# EAGLE board PCB-DISPLAYDOGM1_tall_design (EAGLE 7.1.0)
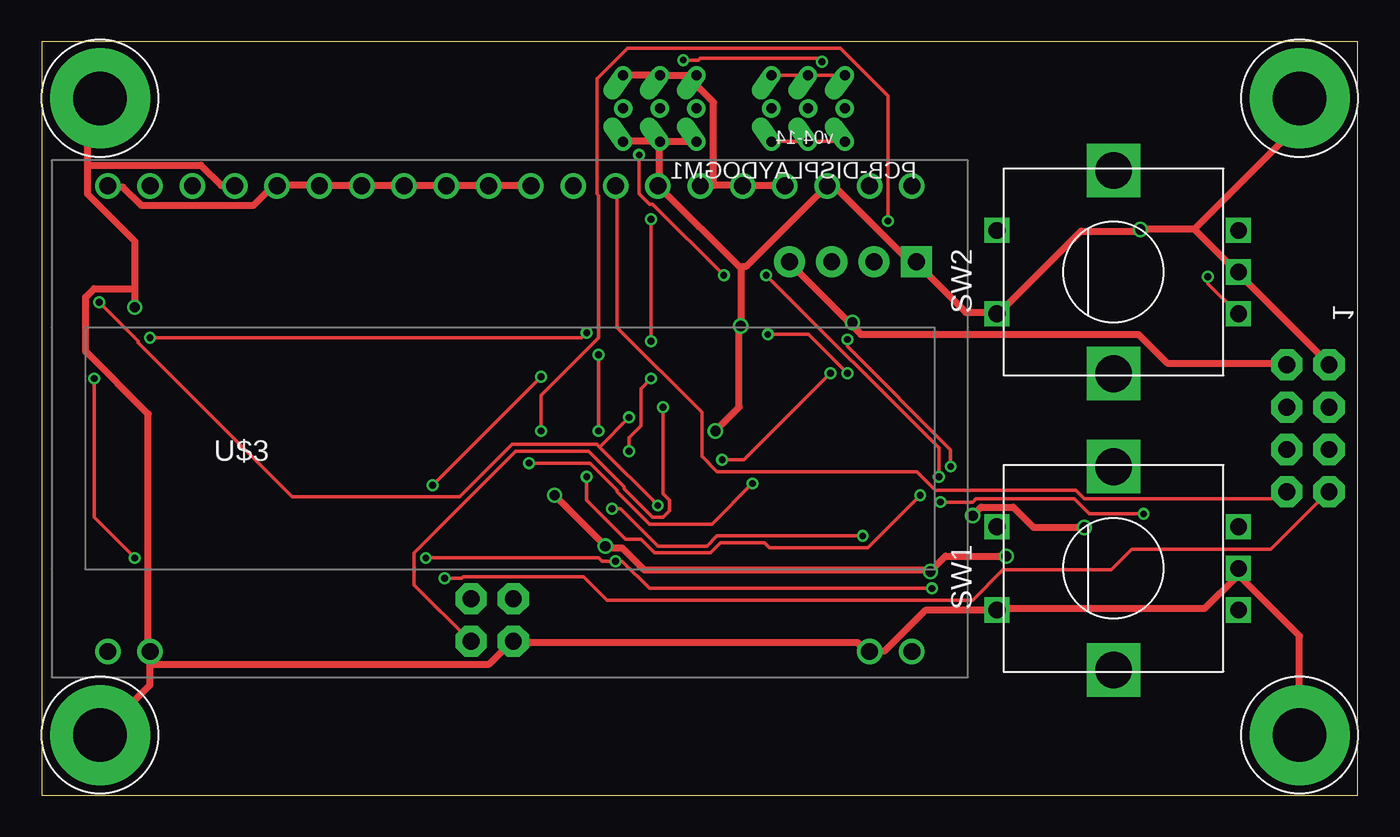
[diagram p0: board, top side]
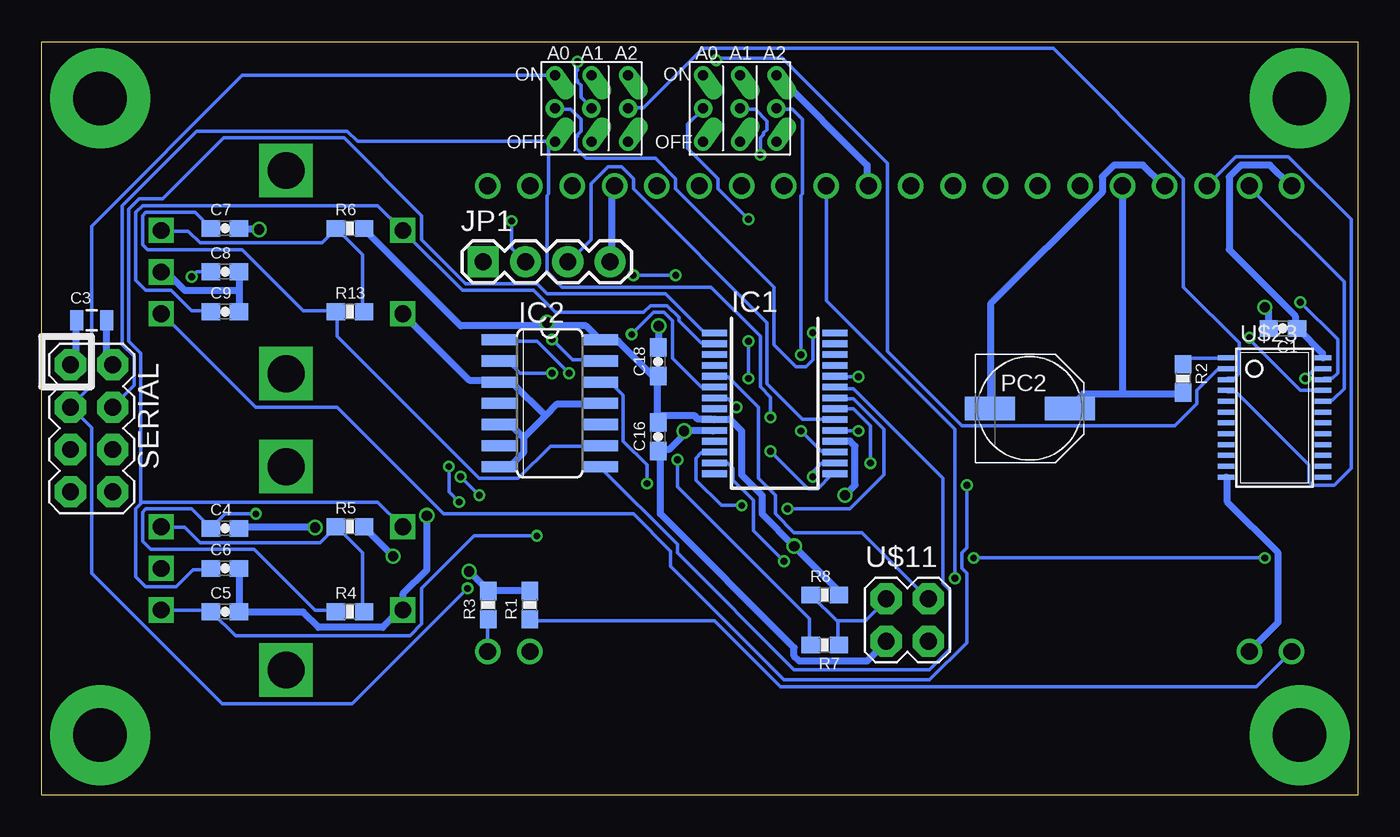
[diagram p1: board, bottom side, seen from below]

Size 79 x 45.2 mm. Coordinates in mm from the lower left corner, seen from the top.
Outline: 79,0 79,45.2 0,45.2 0,0 79,0
Copper layers (1*16): Top 0.035mm / dielectric 1.5mm / Bottom 0.035mm
Design rules "Fusion_eagle_rule_v1.1": minimum track width 6mil, minimum drill 12mil, track to track 6mil, track to pad 6mil, pad to pad 6mil, via to via 6mil, smd to smd 0mil, copper to edge 10mil, drill to drill 10mil, minimum pad ring 10mil, minimum via ring 6mil, stop-mask expansion 2mil, vias tented up to drill 100mil, thermal gap 10mil
Net classes: 0 default: width 0.203 mm, drill 0.406 mm, clearance 0.203 mm; 1 Power: width 0.406 mm, drill 0.61 mm, clearance 0.203 mm; 2 BoostPower: width 0.61 mm, drill 0.61 mm, clearance 0.305 mm

## Footprints (pad centres in the part's own frame; a part is rotated, then mirrored left to right if it is on the bottom)
0603-CAP = smd 1.1 x 1: 1 -0.85,0; 2 0.85,0
0805 = smd 0.8 x 1.2: 1 -0.9,0; 2 0.9,0
SSOP28 = smd 0.4 x 1.5: 1 -4.225,-3.625; 2 -3.575,-3.625; 3 -2.925,-3.625; 4 -2.275,-3.625; 5 -1.625,-3.625; 6 -0.975,-3.625; 7 -0.325,-3.625; 8 0.325,-3.625; 9 0.975,-3.625; 10 1.625,-3.625; 11 2.275,-3.625; 12 2.925,-3.625; 13 3.575,-3.625; 14 4.225,-3.625; 15 4.225,3.625; 16 3.575,3.625; 17 2.925,3.625; 18 2.275,3.625; 19 1.625,3.625; 20 0.975,3.625; 21 0.325,3.625; 22 -0.325,3.625; 23 -0.975,3.625; 24 -1.625,3.625; 25 -2.275,3.625; 26 -2.925,3.625; 27 -3.575,3.625; 28 -4.225,3.625
SO14 = smd 0.66 x 2.032: 1 -3.81,-3.073; 2 -2.54,-3.073; 3 -1.27,-3.073; 4 0,-3.073; 5 1.27,-3.073; 6 2.54,-3.073; 7 3.81,-3.073; 8 3.81,3.073; 9 2.54,3.073; 10 1.27,3.073; 11 0,3.073; 12 -1.27,3.073; 13 -2.54,3.073; 14 -3.81,3.073
1X04 = drill 1.016 pad 1.88 square: 1 0,0 | drill 1.016 pad 1.88: 2 2.54,0; 3 5.08,0; 4 7.62,0
PANASONIC_D = smd 3 x 1.4: + 2.4,0; - -2.4,0
0603-RES = smd 1.1 x 1: 1 -0.85,0; 2 0.85,0
2X4 = drill 1.016 pad 1.88 octagon: 1 -3.81,-1.27; 2 -3.81,1.27; 3 -1.27,-1.27; 4 -1.27,1.27; 5 1.27,-1.27; 6 1.27,1.27; 7 3.81,-1.27; 8 3.81,1.27
ALPS_EC12E_SW = drill 1 square: A -2.5,-7.5; B 2.5,-7.5; C 0,-7.5; D -2.5,7; E 2.5,7 | drill 2.2 square: GND1 -6.1,0; GND2 6.1,0
3.2MMPAD6MM = drill 3.2 pad 6: P$1 0,0
DOGM = drill 1.016: 1 -24.13,-12.19; 2 -21.59,-12.19; 19 21.59,-12.19; 20 24.13,-12.19; 21 24.13,15.75; 22 21.59,15.75; 23 19.05,15.75; 24 16.51,15.75; 25 13.97,15.75; 26 11.43,15.75; 27 8.89,15.75; 28 6.35,15.75; 29 3.81,15.75; 30 1.27,15.75; 31 -1.27,15.75; 32 -3.81,15.75; 33 -6.35,15.75; 34 -8.89,15.75; 35 -11.43,15.75; 36 -13.97,15.75; 37 -16.51,15.75; 38 -19.05,15.75; 39 -21.59,15.75; 40 -24.13,15.75
3BITADDR = drill 0.6: A0 -2.2,0; A1 0,0; A2 2.2,0 | drill 0.6 offset: H1 -2.2,2; H2 0,2; H3 2.2,2; L1 -2.2,-2; L2 0,-2; L3 2.2,-2
2X2 = drill 1.016 pad 1.88 octagon: 1 -3.81,-1.27; 2 -3.81,1.27; 3 -1.27,-1.27; 4 -1.27,1.27
TSSOP24 = smd 0.305 x 0.991: 1 -4.225,-2.918; 2 -3.575,-2.918; 3 -2.925,-2.918; 4 -2.275,-2.918; 5 -1.625,-2.918; 6 -0.975,-2.918; 7 -0.325,-2.918; 8 0.325,-2.918; 9 0.975,-2.918; 10 1.625,-2.918; 11 2.275,-2.918; 12 2.925,-2.918; 13 2.925,2.918; 14 2.275,2.918; 15 1.625,2.918; 16 0.975,2.918; 17 0.325,2.918; 18 -0.325,2.918; 19 -0.975,2.918; 20 -1.625,2.918; 21 -2.275,2.918; 22 -2.925,2.918; 23 -3.575,2.918; 24 -4.225,2.918

## Placement (x,y rotation side)
C1  0.1uF  [0603-CAP]  4.5,28 180 bottom
C3  10uF  [0805]  76,28.5 180 bottom
C4  100nF  [0603-CAP]  68,16 0 bottom
C5  10nF  [0603-CAP]  68,11 0 bottom
C6  10nF  [0603-CAP]  68,13.6 0 bottom
C7  100nF  [0603-CAP]  68,34 0 bottom
C8  10nF  [0603-CAP]  68,31.4 0 bottom
C9  10nF  [0603-CAP]  68,29 0 bottom
C16  100nF  [0603-CAP]  42,21.5 90 bottom
C18  100nF  [0603-CAP]  42,26 90 bottom
IC1  MCP23017SS  [SSOP28]  35,23.5 270 bottom
IC2  74HC14D  [SO14]  48.5,23.5 270 bottom
JP1  [1X04]  52.5,32 0 bottom
PC2  47u  [PANASONIC_D]  19.7,23.2 0 bottom
R1  30R/0.1W  [0603-RES]  49.7,11.4 90 bottom
R2  10K  [0603-RES]  10.5,25 270 bottom
R3  30R/0.1W  [0603-RES]  52.2,11.4 90 bottom
R4  10K  [0603-RES]  60.5,11 0 bottom
R5  10K  [0603-RES]  60.5,16.1 0 bottom
R6  10K  [0603-RES]  60.5,34 0 bottom
R7  10K  [0603-RES]  32,9 180 bottom
R8  10K  [0603-RES]  32,12 0 bottom
R13  10K  [0603-RES]  60.5,29 0 bottom
SERIAL  M04X2  [2X4]  76,22 270 bottom
SW1  EC12E_SW  [ALPS_EC12E_SW]  64.33,13.6 90 top
SW2  EC12E_SW  [ALPS_EC12E_SW]  64.33,31.38 90 top
U$2  GNDPAD6MM  [3.2MMPAD6MM]  3.5,3.6 0 top
U$3  DOGM_DISPLAY  [DOGM]  28.1,20.8 0 top
U$7  GNDPAD6MM  [3.2MMPAD6MM]  75.5,41.8 0 top
U$10  3BITADDR  [3BITADDR]  37.1,41.2 0 bottom
U$11  M02X2  [2X2]  24.5,10.5 0 bottom
U$19  3BITADDR  [3BITADDR]  46,41.2 0 bottom
U$20  GNDPAD6MM  [3.2MMPAD6MM]  3.5,41.8 0 top
U$21  GNDPAD6MM  [3.2MMPAD6MM]  75.5,3.6 0 top
U$23  PCA9671  [TSSOP24]  5,22 270 bottom

## Library data of the parts
C1 C3-C9 C16 C18 JP1 R1-R8 R13 SERIAL = SparkFun
IC1 = microchip; MF: MICROCHIP; MPN: MCP23017-E/SS; OC_FARNELL: 1467674; OC_NEWARK: 31K2960
IC2 = 74xx-eu
PC2 = rcl
SW1 SW2 = switch-alps; MPN: EC12E2424407; OC_FARNELL: 1520813; OC_NEWARK: 74M1068
U$2 U$3 U$7 U$10 U$11 U$19-U$21 U$23 = SKAARHOJ

## Nets
5V [Power]: C1.1 C3.1 C16.2 C18.1 IC1.9 IC1.18 IC2.14 JP1.4 PC2.+ R1.2 R2.2 R3.2 R5.2 R6.2 R8.2 SERIAL.2 U$3.24 U$3.25 U$3.26 U$3.30 U$3.31 U$3.32 U$3.33 U$3.34 U$3.35 U$3.36 U$3.40 U$10.H1 U$10.H2 U$10.H3 U$23.24
A0: U$19.A0 U$23.21
A0A: IC1.15 U$10.A0
A1: U$19.A1 U$23.2
A1A: IC1.16 U$10.A1
A2: U$19.A2 U$23.3
A2A: IC1.17 U$10.A2
AD0: C6.1 IC1.1 SW1.E
AD1: C9.1 IC1.2 SW2.E
AD4: IC1.5 U$11.4
C/D: U$3.39 U$23.20
CS1: U$3.38 U$23.4
D2: IC1.21 IC2.12
D3: C5.1 IC1.22 SW1.A
D4: IC1.23 IC2.8
D5: C8.1 IC1.24 SW2.A
D10: IC1.6 IC2.2
D11: IC1.7 U$11.3
GND [Power]: C1.2 C3.2 C4.2 C5.2 C6.2 C7.2 C8.2 C9.2 C16.1 C18.2 IC1.10 IC2.3 IC2.5 IC2.7 IC2.11 JP1.1 PC2.- SERIAL.1 SW1.C SW1.D SW2.C SW2.D U$2.P$1 U$3.2 U$3.19 U$3.23 U$3.27 U$3.37 U$7.P$1 U$10.L1 U$10.L2 U$10.L3 U$11.1 U$20.P$1 U$21.P$1 U$23.12
I2C_SCL: IC1.12 SERIAL.4 U$19.L1 U$19.L2 U$19.L3 U$23.22
I2C_SDA: IC1.13 SERIAL.3 U$19.H1 U$19.H2 U$19.H3 U$23.23
N$1: R2.1 U$23.1
N$2: R1.1 U$3.1
N$3: R3.1 U$3.20
N$4: R4.2 R5.1 SW1.B
N$5: IC2.1 R7.2
N$6: R6.1 R13.2 SW2.B
N$17: IC1.19 JP1.2
N$18: IC1.20 JP1.3
N$124: C4.1 IC2.13 R4.1
N$125: C7.1 IC2.9 R13.1
N$127: R7.1 R8.1 U$11.2
SPI_MOSI: SERIAL.8 U$3.28
SPI_SCLK: SERIAL.7 U$3.29

## Tracks (layer width: path | path; a pad name or v marks a point on that pad's centre or on a via)
5V  (via drill 0.61)
  Top 0.406: v57.91,14.33 54.25,14.33 v53.34,13.41 53.24,13.51 36.17,13.51 34.85,14.83 33.93,14.83 v33.83,14.94 v30.79,17.98 | U$3.30 29.36,36.58 27.03,36.58 U$3.31 26.82,36.58 24.49,36.58 U$3.32 24.28,36.58 21.95,36.58 U$3.33 21.74,36.58 19.41,36.58 U$3.34 19.2,36.58 16.87,36.58 U$3.35 16.66,36.58 14.22,36.58 U$3.36 13.92,36.58 12.7,35.36 5.99,35.36 4.88,36.47 4.06,36.47 U$3.40 | U$10.H3 34.95,43.18 37.08,43.18 U$10.H2 37.29,43.18 39.22,43.18 U$10.H1 39.22,42.98 39.22,42.67 40.34,41.55 40.34,36.58 | 40.34,36.58 42.06,36.58 U$3.25 42.27,36.58 44.6,36.58 U$3.24 | 40.34,36.58 39.62,36.58 U$3.26 | 48.56,28.25 44.91,31.9 JP1.4 | 48.56,28.25 49.17,27.64 65.84,27.64 67.56,25.91 74.68,25.91 SERIAL.2 | v48.67,28.35 48.56,28.25
  Bottom 0.406: 48.67,28.14 46.33,28.14 45.52,27.33 IC2.14 45.31,27.23 44.4,27.23 42.27,25.09 C18.1 42.06,25.09 42.06,22.35 C16.2 41.96,22.76 39.83,22.76 39.62,22.55 38.81,22.55 IC1.9 38.61,22.55 37.69,22.55 36.98,21.84 36.98,19.2 35.76,17.98 35.76,16.87 v33.83,14.94 31.19,12.29 31.19,12.09 R8.2 | 48.67,28.14 53.85,28.14 59.64,33.93 R6.2 | R1.2 49.78,12.29 52.12,12.29 R3.2 52.32,12.39 v53.34,13.41 | v57.91,14.33 59.64,16.05 R5.2 | v30.79,17.98 30.18,18.59 30.18,20.93 30.48,21.23 31.29,21.23 IC1.18 | U$23.24 2.13,26.31 2.13,26.52 3.56,27.94 C1.1 3.76,28.14 3.76,28.75 7.72,32.72 7.72,37.08 7.01,37.8 5.28,37.8 4.06,36.58 U$3.40 | 14.12,24.08 16.46,24.08 17.27,23.27 PC2.+ | 14.12,24.08 10.57,24.08 R2.2 | 14.12,24.08 14.12,36.47 U$3.36 | C3.1 75.08,28.45 75.08,26.21 74.78,25.91 SERIAL.2 | JP1.4 44.81,32 44.81,36.37 44.7,36.47 U$3.24 | U$3.30 29.46,36.58 29.46,37.8 34.85,43.18 U$10.H3 | v48.67,28.35 48.67,28.14
A0  (via drill 0.41)
  Top 0.203: v6.5,27.43 32.41,27.43 v32.72,27.74
  Bottom 0.203: v6.5,27.43 6.5,27.33 3.45,24.28 2.13,24.28 U$23.21 | v32.72,27.74 32.72,26.11 33.12,25.7 33.73,25.7 35.05,27.03 35.05,30.48 40.95,36.37 40.95,36.98 42.16,38.2 46.33,38.2 46.94,38.81 46.94,39.42 46.84,39.52 46.84,39.62 46.63,39.83 46.63,40.54 47.24,41.15 48.16,41.15 U$19.A0
A0A  (via drill 0.41)
  Top 0.203: v35.26,20.62 35.26,21.44 35.97,22.15 35.97,24.38 v36.58,24.99 | v36.58,34.54 v36.58,27.23
  Bottom 0.203: v35.26,20.62 33.02,18.39 32.41,18.39 31.6,19.2 31.39,19.2 IC1.15 | v36.58,27.23 v36.58,24.99 | v36.58,34.54 38.41,36.37 38.41,36.98 40.23,38.81 40.23,40.23 39.32,41.15 U$10.A0
A1  (via drill 0.41)
  Top 0.203: v38.51,44.09 39.42,44.09 39.52,44.2 46.63,44.2 v46.84,43.99
  Bottom 0.203: v38.51,44.09 38.41,44.2 34.54,44.2 28.25,37.9 28.25,26.62 23.77,22.15 10.97,22.15 9.65,23.47 9.65,24.28 8.43,25.5 7.92,25.5 U$23.2 | v46.84,43.99 46.84,43.48 46.94,43.38 46.94,42.98 46.84,42.88 46.84,42.77 46.63,42.57 46.63,41.86 46.02,41.25 U$19.A1
A1A  (via drill 0.41)
  Top 0.203: v32.72,19.1 32.72,17.68 35.05,15.34 35.97,15.34 36.78,14.53 40.13,14.53 40.74,15.14 43.38,15.14 43.69,14.83 49.58,14.83 v52.73,17.98 | v53.85,19.1 53.85,20.83 v43.48,31.19 | v40.95,31.19 36.68,35.46 36.47,35.46 35.87,36.07 v35.87,38.41
  Bottom 0.203: v32.72,19.1 32.72,19.41 32.21,19.91 31.39,19.91 IC1.16 | v53.85,19.1 v52.73,17.98 | v40.95,31.19 v43.48,31.19 | v35.87,38.41 35.87,39.42 35.66,39.62 35.66,39.73 35.46,39.93 35.46,40.44 36.17,41.15 37.08,41.15 U$10.A1
A2
  Bottom 0.203: U$23.3 7.82,24.99 7.42,24.99 7.11,25.3 7.11,27.13 10.46,30.48 10.46,36.98 18.29,44.81 39.32,44.81 42.88,41.25 43.79,41.25 U$19.A2
A2A  (via drill 0.41)
  Top 0.203: v33.43,26.42 v33.43,21.84
  Bottom 0.203: v33.43,21.84 32.21,20.62 31.39,20.62 IC1.17 | v33.43,26.42 33.43,35.97 33.33,36.07 33.33,40.54 33.93,41.15 34.85,41.15 U$10.A2
AD0
  Bottom 0.203: 73,17.53 72.95,17.58 58.83,17.58 57.4,16.15 SW1.E | 73,17.53 73.36,17.17 73.36,13.11 72.75,12.5 70.92,12.5 69.9,13.51 68.89,13.51 C6.1 | IC1.1 38.71,27.74 39.22,27.74 41.55,30.07 48.67,30.07 49.28,30.68 53.54,30.68 56.19,33.33 56.19,34.75 60.86,39.42 68.07,39.42 71.73,35.76 73.15,35.76 73.76,35.15 73.76,27.23 73.05,26.52 73.05,17.58 73,17.53
AD1
  Bottom 0.203: C9.1 68.89,29.06 70,29.06 71.22,30.28 72.75,30.28 73.36,30.89 73.36,34.95 72.95,35.36 58.83,35.36 57.4,33.93 SW2.E 57.3,33.83 53.75,30.28 49.48,30.28 48.16,28.96 42.88,28.96 42.47,29.36 41.45,29.36 40.74,28.65 40.74,28.45 39.42,27.13 38.71,27.13 IC1.2
AD4
  Bottom 0.203: IC1.5 38.61,25.09 37.8,25.09 35.97,23.27 35.97,19 34.95,17.98 34.95,16.87 33.83,15.75 29.77,15.75 25.81,11.79 U$11.4
C/D
  Bottom 0.203: U$23.20 2.03,23.67 1.52,23.67 0.81,24.38 0.81,30.79 6.5,36.47 U$3.39
CS1
  Bottom 0.203: U$23.4 7.82,24.18 7.32,24.18 2.95,19.81 2.95,18.8 2.74,18.59 1.42,18.59 0.41,19.61 0.41,34.54 4.17,38.3 7.32,38.3 9.04,36.58 U$3.38
D2  (via drill 0.41)
  Top 0.203: v29.26,19.91 32.92,19.91 34.54,18.29 34.54,18.19 36.47,16.26 40.23,16.26 v42.67,18.69
  Bottom 0.203: v29.26,19.91 29.26,22.15 30.28,23.16 31.29,23.16 IC1.21 | v42.67,18.69 42.67,19.81 44.09,21.23 44.09,23.98 44.81,24.69 45.41,24.69 IC2.12
D3  (via drill 0.41)
  Top 0.203: v34.24,17.17 34.75,17.17 36.98,14.94 39.93,14.94 40.54,15.54 v49.28,15.54
  Bottom 0.203: SW1.A 71.73,11.07 68.89,11.07 C5.1 68.78,10.97 67.36,9.55 56.9,9.55 56.19,10.26 56.19,12.39 53.03,15.54 v49.28,15.54 | v34.24,17.17 30.48,17.17 28.45,19.2 28.45,21.95 30.28,23.77 31.29,23.77 IC1.22
D4
  Bottom 0.203: IC1.23 31.29,24.38 30.28,24.38 24.89,19 24.89,12.7 24.49,12.29 24.49,8.74 25.7,7.52 33.83,7.52 40.84,14.53 40.84,15.04 45.41,19.61 IC2.8
D5  (via drill 0.41)
  Top 0.203: v70,31.09 70,30.68 71.73,28.96 SW2.A | v23.47,18.59 v29.97,25.09
  Bottom 0.203: v70,31.09 69.7,31.39 68.89,31.39 C8.1 | v29.97,25.09 31.29,25.09 IC1.24 | v23.47,18.59 23.47,14.83 23.77,14.53 23.77,13.61 23.47,13.31 23.47,9.14 25.7,6.91 34.44,6.91 41.25,13.72 41.25,14.63 43.48,16.87 54.86,16.87 61.27,23.27 66.14,23.27 71.73,28.85 SW2.A
D10  (via drill 0.41)
  Top 0.203: v43.59,27.64 46.02,27.64 v48.36,25.3
  Bottom 0.203: v43.59,27.64 42.27,28.96 41.66,28.96 41.15,28.45 41.15,26.21 39.42,24.49 38.71,24.49 IC1.6 | v48.36,25.3 50.29,25.3 51,26.01 51.51,26.01 IC2.2
D11  (via drill 0.41)
  Top 0.203: v37.29,23.27 37.29,18.09 37.69,17.68 37.69,17.07 37.29,16.66 36.68,16.66 34.95,18.39 34.95,18.49 32.82,20.62 28.45,20.62 22.35,14.53 22.35,12.6 25.7,9.25 U$11.3
  Bottom 0.203: v37.29,23.27 37.8,23.77 38.61,23.77 IC1.7
GND  (via drill 0.61)
  Top 0.406: 69.19,33.93 v65.94,33.93 65.84,33.83 62.38,33.83 57.51,28.96 SW2.D 57.3,28.96 55.47,28.96 52.53,31.9 JP1.1 52.32,32 52.12,32 47.65,36.47 47.24,36.47 U$3.23 47.04,36.47 42.27,31.7 42.06,31.7 41.96,31.6 | 69.19,33.93 71.73,31.39 SW2.C 71.83,31.29 77.22,25.91 SERIAL.1 | U$10.L3 34.95,39.22 37.08,39.22 U$10.L2 | U$10.L1 39.22,39.22 37.29,39.22 U$10.L2 | 41.96,31.6 v41.96,28.14 41.86,28.04 41.86,23.27 v40.44,21.84 | 41.96,31.6 37.08,36.47 U$3.27 37.08,36.68 37.08,39.01 U$10.L2 | 69.19,33.93 75.49,40.23 75.49,41.76 U$7.P$1 | 5.59,30.38 5.59,33.22 2.74,36.07 2.74,37.8 | 5.59,30.38 v5.59,29.26 | 2.74,37.8 2.74,41.05 3.45,41.76 U$20.P$1 | 2.74,37.8 9.55,37.8 10.77,36.58 11.58,36.58 U$3.37 | 6.5,7.82 6.5,6.6 3.56,3.66 U$2.P$1 | 6.5,7.82 6.5,8.53 U$3.2 6.4,8.74 6.4,22.86 2.64,26.62 2.64,29.87 3.15,30.38 5.59,30.38 | v62.59,16.05 59.54,16.05 58.32,17.27 56.39,17.27 v55.88,16.76 | U$21.P$1 75.49,3.66 75.49,9.55 71.83,13.21 71.83,13.51 SW1.C 71.73,13.11 69.8,11.18 57.51,11.18 SW1.D 57.3,11.07 53.03,11.07 50.6,8.64 49.78,8.64 U$3.19 49.48,8.64 48.97,9.14 28.35,9.14 U$11.1 28.14,9.14 26.82,7.82 6.5,7.82
  Bottom 0.406: C3.2 76.91,28.45 76.91,26.21 77.22,25.91 SERIAL.1 | 67.16,30.28 C8.2 | 67.16,30.28 67.16,29.06 C9.2 | v65.94,33.93 67.06,33.93 C7.2 | 67.16,30.28 70.41,30.28 71.42,31.29 71.73,31.29 SW2.C | v41.96,28.14 41.96,26.92 C18.2 | 51.61,19.71 IC2.7 51.41,19.81 50.8,19.81 50.09,20.52 50.09,21.44 | 50.09,21.44 50.8,22.15 51.51,22.15 IC2.5 | 50.09,21.44 48.77,22.76 | 48.77,22.76 48.06,23.47 45.52,23.47 IC2.11 | 48.77,22.76 50.7,24.69 51.51,24.69 IC2.3 51.71,24.89 53.34,24.89 57.3,28.85 SW2.D | PC2.- 22.05,23.27 22.05,29.46 15.34,36.17 15.34,37.08 14.63,37.8 12.9,37.8 11.68,36.58 U$3.37 | v5.59,29.26 5.38,29.06 5.38,28.04 C1.2 | U$23.12 7.82,19 7.82,17.58 4.78,14.53 4.78,10.36 6.5,8.64 U$3.2 | 40.34,21.74 40.23,21.84 38.71,21.84 IC1.10 | 40.34,21.74 41.35,20.73 41.96,20.73 C16.1 41.86,20.52 41.86,16.87 33.83,8.84 33.83,8.33 33.53,8.03 29.46,8.03 28.35,9.14 U$11.1 | C6.2 67.16,13.51 67.16,11.07 C5.2 66.95,10.97 63.3,10.97 62.38,10.06 58.52,10.06 57.51,11.07 SW1.D 57.3,11.18 57.3,12.09 55.88,13.51 v55.88,16.76 | v62.59,16.05 67.06,16.05 C4.2 | v40.44,21.84 40.34,21.74
I2C_SCL  (via drill 0.41)
  Top 0.203: v3.45,29.57 5.79,27.23 5.79,27.13 15.04,17.88 25.09,17.88 28.25,21.03 33.33,21.03 33.48,20.88 | v36.98,17.37 33.48,20.88 | U$19.L3 43.89,39.22 45.92,39.22 U$19.L2 46.02,39.22 48.16,39.22 U$19.L1 | v35.26,22.66 33.48,20.88
  Bottom 0.203: v3.45,29.57 1.22,27.33 1.22,25.3 1.52,24.99 2.03,24.99 U$23.22 | v36.98,17.37 38.2,17.37 39.73,18.9 39.73,20.22 39.42,20.52 38.71,20.52 IC1.12 | 48.56,39.22 60.05,39.22 60.66,39.83 69.7,39.83 74.17,35.36 74.17,27.03 73.46,26.31 73.46,24.59 74.68,23.37 SERIAL.4 | 48.56,39.22 48.26,39.22 U$19.L1 48.56,39.22 | v35.26,22.66 35.26,23.88 35.87,24.49 35.87,27.53 38.81,30.48 47.75,30.48 48.67,31.39 48.67,35.97 48.56,36.07 48.56,39.22
I2C_SDA  (via drill 0.41)
  Top 0.203: v3.15,24.99 3.15,16.66 v5.59,14.22 | v23.06,14.22 33.43,14.22 33.63,14.02 v34.44,14.02 34.85,14.02 36.47,12.39 v53.44,12.39 | U$19.H3 43.89,43.18 45.92,43.18 U$19.H2 46.02,43.18 48.16,43.18 U$19.H1
  Bottom 0.203: v3.15,24.99 2.64,25.5 2.13,25.5 U$23.23 | v23.06,14.22 v5.59,14.22 | v34.44,14.02 36.27,15.85 36.27,17.68 37.49,18.9 37.49,19.61 37.8,19.91 38.61,19.91 IC1.13 | U$19.H1 48.26,43.18 66.95,43.18 76,34.14 76,24.59 77.22,23.37 SERIAL.3 77.22,23.27 76,22.05 76,13.31 68.17,5.49 60.35,5.49 v53.44,12.39
N$1
  Bottom 0.203: U$23.1 7.92,26.21 10.16,26.21 10.46,25.91 R2.1
N$2
  Bottom 0.203: R1.1 49.68,10.46 38.61,10.46 34.65,6.5 6.1,6.5 4.06,8.53 U$3.1
N$3
  Bottom 0.203: R3.1 52.22,10.46 52.22,8.64 U$3.20
N$4
  Bottom 0.203: R4.2 59.74,11.07 59.74,14.53 61.27,16.05 R5.1 61.37,16.05 62.28,15.14 69.49,15.14 70.41,16.05 71.73,16.05 SW1.B
N$5  (via drill 0.41)
  Top 0.203: v40.84,20.12 42.16,20.12 v47.35,25.3
  Bottom 0.203: v40.84,20.12 40.84,18.49 32.92,10.57 32.92,9.04 R7.2 | v47.35,25.3 49.28,27.23 51.51,27.23 IC2.1
N$6
  Bottom 0.203: R13.2 59.74,29.06 59.74,32.41 61.27,33.93 R6.1 61.37,33.93 62.18,33.12 69.49,33.12 70.21,33.83 71.73,33.83 SW2.B
N$17  (via drill 0.41)
  Top 0.203: v29.97,21.84 29.97,23.98 33.43,27.43 33.43,35.97 33.33,36.07 33.33,42.98 35.15,44.81 47.95,44.81 50.8,41.96 v50.8,34.44
  Bottom 0.203: v29.97,21.84 31.29,21.84 IC1.19 | v50.8,34.44 50.8,32.82 49.99,32 JP1.2
N$18
  Bottom 0.203: IC1.20 31.39,22.55 33.33,22.55 35.46,24.69 35.46,28.35 43.48,36.37 43.48,36.98 44.2,37.69 45.01,37.69 46.02,36.68 46.02,33.33 47.35,32 JP1.3
N$124  (via drill 0.41)
  Top 0.203: v48.36,27.33 48.36,26.92 54.56,20.73 v54.56,19.71 | v53.95,17.58 55.88,17.58 56.08,17.78 61.98,17.78 62.89,16.87 v66.14,16.87
  Bottom 0.203: R4.1 61.37,11.07 62.59,11.07 66.24,14.73 72.44,14.73 72.95,15.24 72.95,16.97 72.75,17.17 70,17.17 68.89,16.05 C4.1 68.78,16.05 67.97,16.87 v66.14,16.87 | v48.36,27.33 47.14,26.11 45.52,26.11 IC2.13 | v54.56,19.71 54.56,18.19 v53.95,17.58
N$125
  Bottom 0.203: C7.1 68.89,34.04 69.8,34.95 72.75,34.95 72.95,34.75 72.95,33.02 72.64,32.72 66.95,32.72 63.3,29.06 61.37,29.06 R13.1 61.27,28.96 61.27,27.53 52.73,19 50.39,19 48.46,20.93 45.52,20.93 IC2.9
N$127
  Bottom 0.203: 31.24,10.41 32.82,11.99 R8.1 | 31.24,10.41 31.19,10.36 31.19,9.04 R7.1 | 31.24,10.41 31.19,10.46 29.57,10.46 28.35,11.68 U$11.2
SPI_MOSI
  Top 0.203: U$3.28 34.54,36.47 34.54,28.04 39.62,22.96 39.62,20.32 40.54,19.41 52.53,19.41 53.65,18.29 62.08,18.29 62.59,17.78 74.27,17.78 74.68,18.19 SERIAL.8
SPI_SCLK  (via drill 0.41)
  Top 0.203: v24.18,13.01 25.2,13.01 25.3,13.11 32.51,13.11 33.93,11.68 55.88,11.68 57.71,13.51 64.21,13.51 65.43,14.73 73.76,14.73 77.22,18.19 SERIAL.7
  Bottom 0.203: v24.18,13.01 24.18,21.95 31.9,29.67 31.9,36.47 U$3.29

## Text on the board
_tsilk: v04-14 | PCB-DISPLAYDOGM1 | 1